# Altium PCB motherboard.PcbDoc
Units mm, origin at the board's own origin, x right, y up, seen from the top; angles counter-clockwise.
Board outline 90 x 64 mm, 2 copper layers (Top Layer, Bottom Layer); 9 components, 25 nets, 93 pads, 0 vias.
Unrouted connection lines stored in the file: 8.
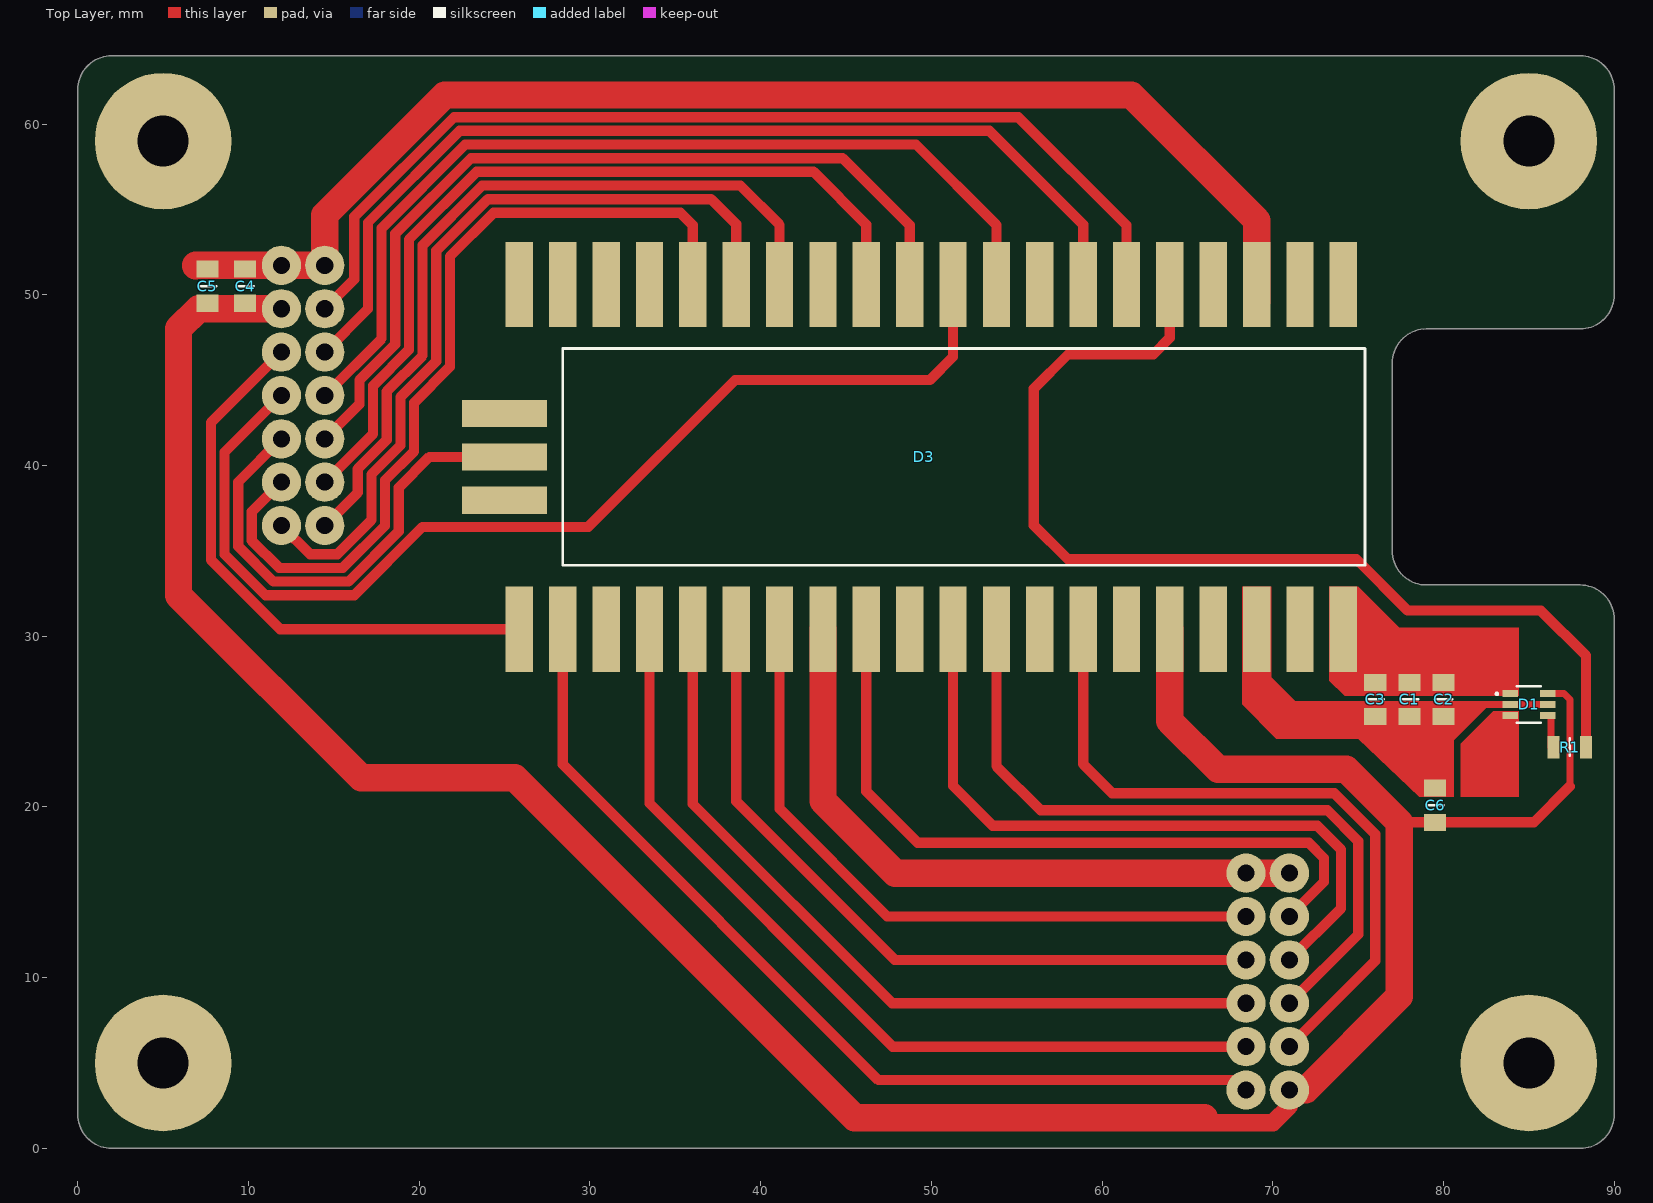
[diagram p0: Top Layer view]
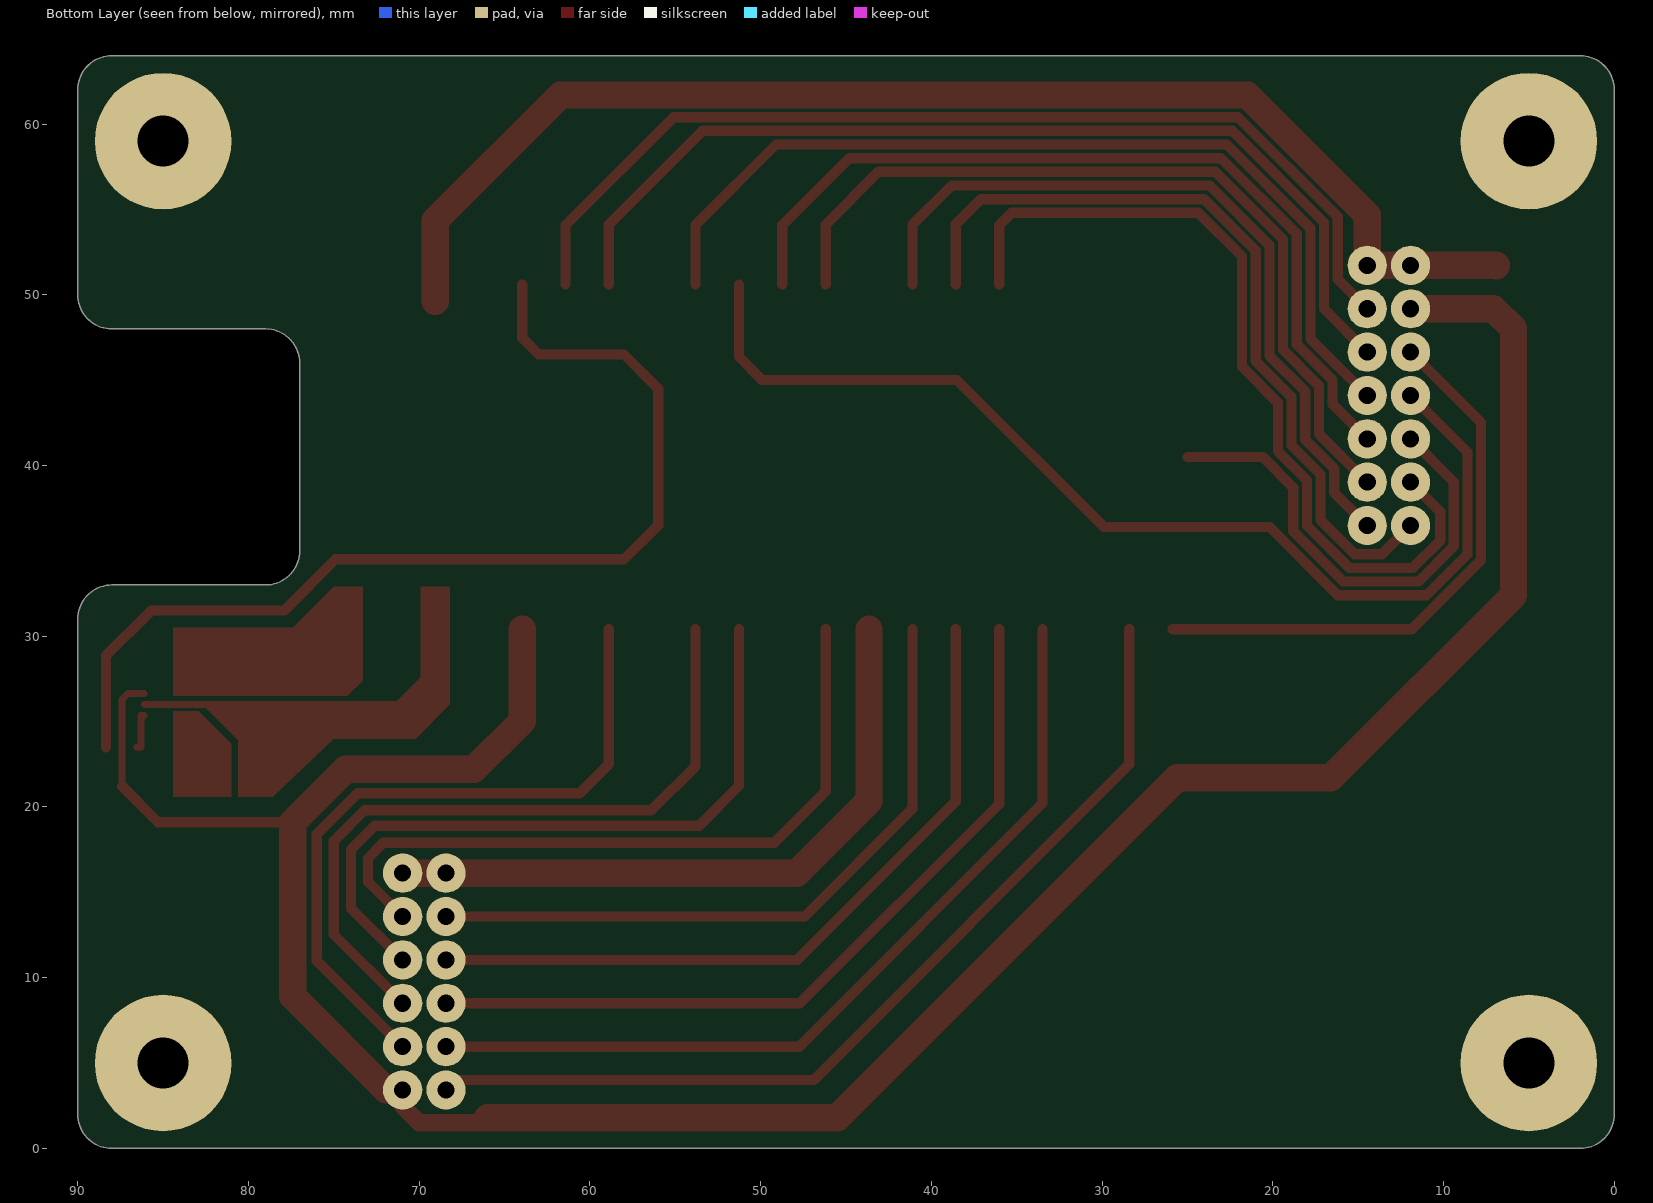
[diagram p1: Bottom Layer view, seen from below]
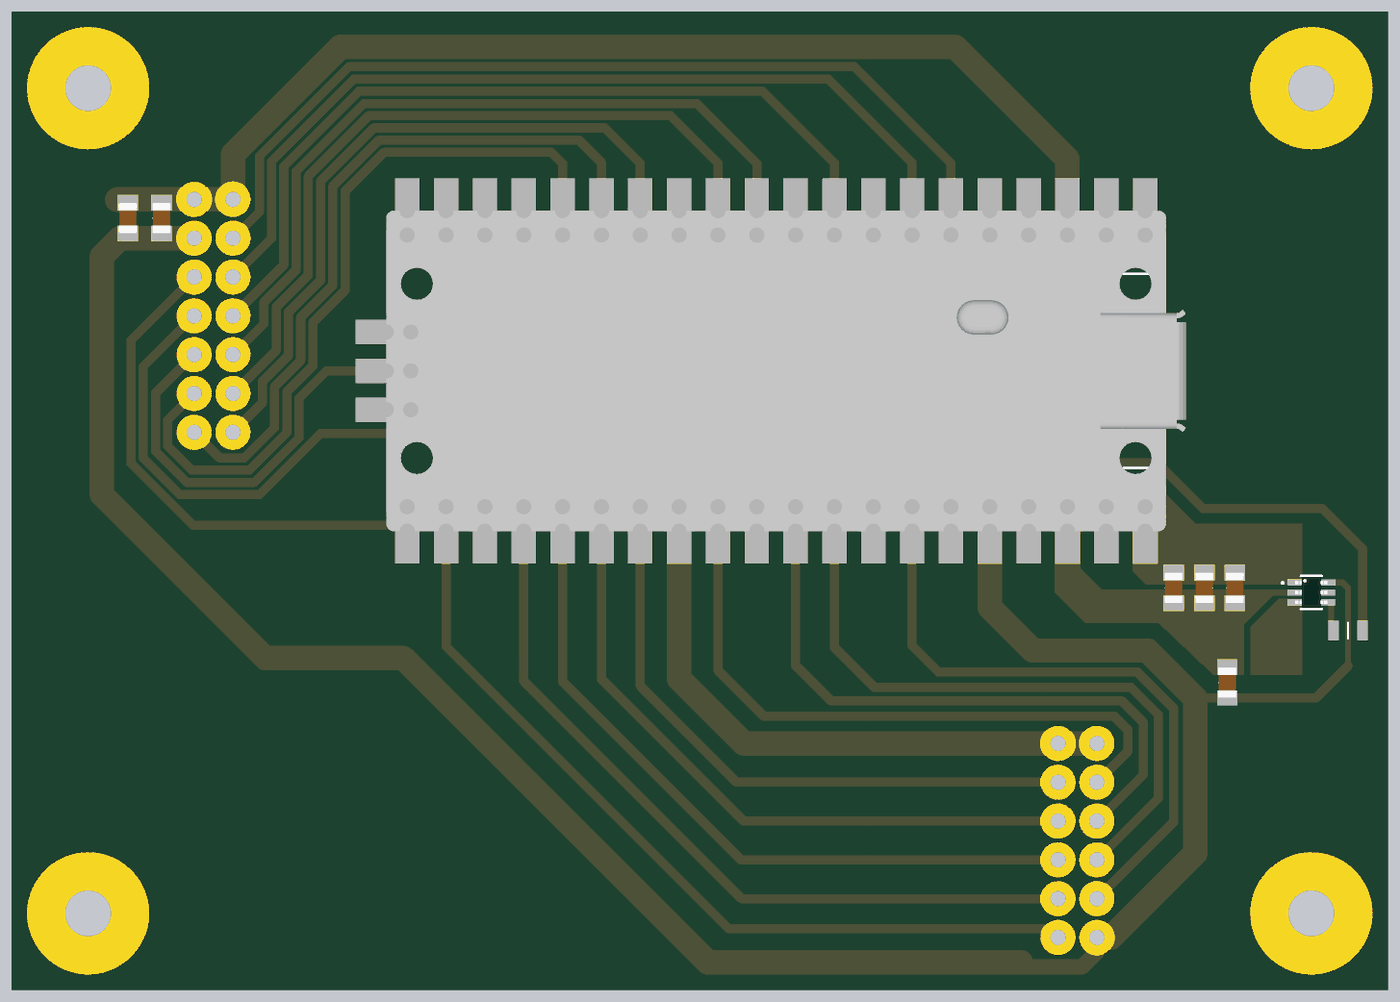
[diagram p2: 3D render of the assembled board from above, using the file's embedded part models]

## Layer stack, top to bottom
Top Solder: solder mask 0.0102, Solder Resist, Dk 3.5
Top Layer: signal copper 0.0356
Dielectric 1: dielectric 0.32, FR-4, Dk 4.8
Bottom Layer: signal copper 0.0356
Bottom Solder: solder mask 0.0102, Solder Resist, Dk 3.5

## Board outline
0,2 ccw(c2,2) 2,0 88,0 ccw(c88,2) 90,2 90,31 ccw(c88,31) 88,33 79,33 cw(c79,35) 77,35 77,46 cw(c79,46) 79,48 88,48 ccw(c88,50) 90,50 90,62 ccw(c88,62) 88,64 2,64 ccw(c2,62) 0,62

## Design rules (kind name [scope] priority, off if disabled: settings)
Clearance [All] p1: gap=0.2 ignorepadtopadclearanceinfootprint=FALSE
HoleSize [All] p1: absolutevalues=TRUE maxlimit=3 minlimit=1 maxpercent=80.000 minpercent=20.000
MinimumSolderMaskSliver [All] p1: minsoldermaskwidth=0.05
OvershootRising [All] p1: maximum=1,000
PolygonConnect [All] p1: connectstyle=Relief reliefconductorwidth=0.254 reliefentries=4 polygonreliefangle="90 Angle" airgapwidth=0.254
RoutingVias [All] p1: holewidth=0.711 width=1.27 viastyle="Through Hole" minholewidth=0.711 minwidth=1.27 maxholewidth=0.711 maxwidth=1.27
SilkToSilkClearance [All] p1: silktosilkclearance=0.1
SilkToSolderMaskClearance [IsPad] p1: minsilkscreentomaskgap=0.1 clearancetoexposedcopper=TRUE
SolderMaskExpansion [All] p1: expansion=0.025
Width [All] p1: maxlimit=2 minlimit=0.4 preferedwidth=0.6
26 further rules are at their usual default settings.

## Components (designator, comment, footprint, x,y, rotation, side; value= is the part's Value field where it differs from the comment)
C1 "GRM21BR71H104K" 0805-CAP 78,26.3 r90 top value="0.1 мкФ"
C2 "GRM21BR71H104K" 0805-CAP 80,26.3 r90 top value="0.1 мкФ"
C3 "GRM21BR71H104K" 0805-CAP 76,26.3 r90 top value="0.1 мкФ"
C4 "GRM21BR71H104K" 0805-CAP 9.8,50.5 r270 top value="0.1 мкФ"
C5 "GRM21BR71H104K" 0805-CAP 7.6,50.5 r270 top value="0.1 мкФ"
C6 "GRM21BR71H104K" 0805-CAP 79.5,20.1 r270 top value="0.1 мкФ"
D1 "SN74LVC1T45DCKT" sc70-6 85,26 r270 top
D3 "Pi Pico" "Pi Pico" 50,40.5 r270 top locked
R1 "RC0805FR-0710KL" 0805-RES 87.4,23.5 r180 top value="10 кОм"

## Footprints (in the part's own frame and the unit in brackets; to place one, negate y for a bottom-side part, rotate by r counter-clockwise, add the part's x,y. Pads: shape width x height; smd on the part's side, far side on the other; paste and mask are expansions set on the pad)
0805-CAP [mm] "Согласно IPC-SM-782"
  rect 1x1.3 smd: 1(-1,0) 2(1,0)
  silkscreen extent 0,-0.51 0,0.51, body extent -1,-0.6 1,0.6, height 1.2
0805-RES [mm] "Standard Thick Film Chip Resistors D/CRCW e3 Vishay"
  rect 0.7x1.3 smd: 1(-0.95,0) 2(0.95,0)
  silkscreen extent 0,-0.51 0,0.51, body extent -1,-0.63 1,0.63, height 0.5
"Pi Pico" [mm] "Raspberry Pi Pico, EVB RP2040"
  rect 5x1.6 smd: 1(-10.1,24.13) 2(-10.1,21.59) 3(-10.1,19.05) 4(-10.1,16.51) 5(-10.1,13.97) 6(-10.1,11.43) 7(-10.1,8.89) 8(-10.1,6.35) 9(-10.1,3.81) 10(-10.1,1.27) 11(-10.1,-1.27) 12(-10.1,-3.81) 13(-10.1,-6.35) 14(-10.1,-8.89) 15(-10.1,-11.43) 16(-10.1,-13.97) 17(-10.1,-16.51) 18(-10.1,-19.05) 19(-10.1,-21.59) 20(-10.1,-24.13) 21(10.1,-24.13) 22(10.1,-21.59) 23(10.1,-19.05) 24(10.1,-16.51) 25(10.1,-13.97) 26(10.1,-11.43) 27(10.1,-8.89) 28(10.1,-6.35) 29(10.1,-3.81) 30(10.1,-1.27) 31(10.1,1.27) 32(10.1,3.81) 33(10.1,6.35) 34(10.1,8.89) 35(10.1,11.43) 36(10.1,13.97) 37(10.1,16.51) 38(10.1,19.05) 39(10.1,21.59) 40(10.1,24.13)
  rect 1.6x5 smd: D1(-2.54,-25) D2(0,-25) D3(2.54,-25)
  silkscreen extent -6.35,-21.59 6.35,25.4, body extent -10.5,-25.5 10.5,26.8, height 3.73
sc70-6 [mm] "футпринт для TMP300B-Q1"
  rect 0.4x0.9 smd: 1(-0.65,-1.1) 2(0,-1.1) 3(0.65,-1.1) 4(0.65,1.1) 5(0,1.1) 6(-0.65,1.1)
  silkscreen extent -1.08,-1.93 1.08,0.7, body extent -1,-1.05 1,1.05, height 0.92

## Part data
C1 C2 C3 C4 C5 C6: library part CMP-0544-A.1, "Конденсатор керамический, 0.1 мкФ, X7R, 50 В, точность 10%, 0805", Voltage="50 В", Accuracy=10%
D1: library part CMP-0607-A.1, "Преобразователь логических уровней с входом направления, 1.65 - 5.5 В", Manufacturer="Texas Instruments", Temperature="-40 - 85°C"
D3: library part CMP-0736-A.1, "Отладочная плата микроконтроллера RP2040, 1.62 - 3.63 В", Manufacturer="Raspberry Pi", Temperature="-20 - 85°C"
R1: library part CMP-0677-A.2, "Резистор, 10 кОм, 0.125 Вт, точность 1%, 0805", Accuracy=1%

## Free pads (board coordinates)
  round 2.3 hole 1: 1(11.93,36.48) 1(68.43,3.42) 2(14.47,36.48) 2(70.97,3.42) 3(11.93,39.02) 3(68.43,5.96) 4(14.47,39.02) 4(70.97,5.96) 5(11.93,41.56) 5(68.43,8.5) 6(14.47,41.56) 6(70.97,8.5) 7(11.93,44.1) 7(68.43,11.04) 8(14.47,44.1) 8(70.97,11.04) 9(11.93,46.64) 9(68.43,13.58) 10(14.47,46.64) 10(70.97,13.58) 11(11.93,49.18) 11(68.43,16.12) 12(14.47,49.18) 12(70.97,16.12) 13(11.93,51.72) 14(14.47,51.72)
  round 8 hole 3: PAD(5,5) PAD(5,59) PAD(85,5) PAD(85,59)

## Nets (pads, with @x,y where several pads share a name; then routed paths per layer and width w, separated by ;. In a path a pad name is that pad's centre, name@x,y a point inside that pad or via, vN(x,y) a via of type N, cw(c..) or ccw(c..) an arc to the next point about the centre after c; other vN are vias at no path point)
3V3: C4.2 C5.2 C6.2 D1.6 D3.36 pad.2@70.97,3.42 pad.11@11.93,49.18 | length 181.6
  Top Layer w0.4: D1.6 87.05,26.65 87.4,26.3 87.4,21.2
  Top Layer w0.6: 43.9,3.3 45.7,1.5 ; 77.4,19.1 85.3,19.1 87.4,21.2
  Top Layer w1: 45.7,1.5 70,1.5 70.97,2.47 pad.2@70.97,3.42
  Top Layer w1.6: pad.11@11.93,49.18 7.08,49.18 5.9,48 5.9,32.4 16.6,21.7 25.6,21.7 45.5,1.8 66,1.8 ; D3.36 63.97,25.03 66.8,22.2 74.3,22.2 77.4,19.1 77.4,8.9 71.92,3.42 pad.2@70.97,3.42
5V0: C1.2 C2.2 C3.2 D1.1 D3.40
BLK: D3.6 pad.12@14.47,49.18 | length 59.8
  Top Layer w0.6: pad.12@14.47,49.18 16.2,50.91 16.2,54.562 22.038,60.4 55.1,60.4 61.43,54.07 D3.6
CS0: D3.15 pad.1@11.93,36.48 | length 47.1
  Top Layer w0.6: pad.1@11.93,36.48 13.61,34.8 15.2,34.8 17.2,36.8 17.2,39.469 18.9,41.169 18.9,44.005 21,46.105 21,52.573 24.027,55.6 37.1,55.6 38.57,54.13 D3.15
CS1: D3.21 pad.9@11.93,46.64 | length 33.6
  Top Layer w0.6: pad.9@11.93,46.64 7.8,42.51 7.8,34.469 11.869,30.4 D3.21
CS2: D3.12 pad.4@14.47,39.02 | length 49.5
  Top Layer w0.6: pad.4@14.47,39.02 17.3,41.85 17.3,44.667 19.4,46.767 19.4,53.236 23.364,57.2 43.1,57.2 46.19,54.11 D3.12
DC: D3.7 pad.10@14.47,46.64 | length 58.5
  Top Layer w0.6: pad.10@14.47,46.64 17,49.17 17,54.23 22.37,59.6 53.4,59.6 58.89,54.11 D3.7
ENC0_A: D3.25 pad.5@68.43,8.5 | length 47.5
  Top Layer w0.6: D3.25 36.03,20.17 47.7,8.5 pad.5@68.43,8.5
ENC0_B: D3.32 pad.6@70.97,8.5 | length 42.2
  Top Layer w0.6: D3.32 53.81,22.39 56.4,19.8 73.2,19.8 75,18 75,12.53 pad.6@70.97,8.5
ENC0_SW: D3.34 pad.4@70.97,5.96 | length 41.2
  Top Layer w0.6: D3.34 58.89,22.51 60.6,20.8 73.6,20.8 76,18.4 76,10.99 pad.4@70.97,5.96
ENC1_A: D3.26 pad.7@68.43,11.04 | length 43.8
  Top Layer w0.6: D3.26 38.57,20.33 47.86,11.04 pad.7@68.43,11.04
ENC1_B: D3.31 pad.8@70.97,11.04 | length 41.2
  Top Layer w0.6: D3.31 51.27,21.23 53.6,18.9 72.6,18.9 74,17.5 74,14.07 pad.8@70.97,11.04
ENC1_SW: D3.24 pad.3@68.43,5.96 | length 51
  Top Layer w0.6: D3.24 33.49,20.21 47.74,5.96 pad.3@68.43,5.96
ENC2_A: D3.27 pad.9@68.43,13.58 | length 40.4
  Top Layer w0.6: D3.27 41.11,19.89 47.42,13.58 pad.9@68.43,13.58
ENC2_B: D3.29 pad.10@70.97,13.58 | length 42.2
  Top Layer w0.6: D3.29 46.19,20.91 49.2,17.9 72.1,17.9 73,17 73,15.61 pad.10@70.97,13.58
ENC2_SW: D3.22 pad.1@68.43,3.42 | length 55.8
  Top Layer w0.6: D3.22 28.41,22.49 46.9,4 67.85,4 pad.1@68.43,3.42
GND: C1.1 C2.1 C3.1 C4.1 C5.1 C6.1 D1.2 D1.5 D3.3 D3.8 D3.13 D3.18 D3.23 D3.28 D3.33 D3.38 D3.D2 pad.5@11.93,41.56 pad.11@68.43,16.12 pad.12@70.97,16.12 pad.13 pad.14 | length 145.5
  Top Layer w0.4: D1.2 D1.5
  Top Layer w0.6: pad.5@11.93,41.56 9.4,39.03 9.4,35.269 11.469,33.2 15.863,33.2 18.8,36.137 18.8,38.7 20.6,40.5 D3.D2
  Top Layer w1.6: 6.9,51.7 6.92,51.72 pad.13 pad.14 14.47,54.67 21.5,61.7 61.7,61.7 69.05,54.35 D3.3@69.05,49.6 ; D3.28 43.65,20.35 47.88,16.12 68.43,16.12 pad.12@70.97,16.12
NetD1_4: D1.4 R1.2 | length 2.3
  Top Layer w0.4: D1.4 86.3,25.35 86.3,23.5 R1.2@86.55,23.5
RST0: D3.14 pad.2@14.47,36.48 | length 45.6
  Top Layer w0.6: pad.2@14.47,36.48 16.4,38.41 16.4,39.8 18.1,41.5 18.1,44.336 20.2,46.436 20.2,52.905 23.695,56.4 38.8,56.4 41.11,54.09 D3.14
RST1: D3.11 pad.6@14.47,41.56 | length 50.8
  Top Layer w0.6: pad.6@14.47,41.56 16.5,43.59 16.5,44.999 18.6,47.099 18.6,53.567 23.033,58 44.8,58 48.73,54.07 D3.11
RST2: D3.16 pad.3@11.93,39.02 | length 50
  Top Layer w0.6: pad.3@11.93,39.02 10.2,37.29 10.2,35.6 11.8,34 15.531,34 18,36.469 18,39.137 19.7,40.837 19.7,43.673 21.8,45.773 21.8,52.242 24.358,54.8 35.3,54.8 36.03,54.07 D3.16
SCL: D3.9 pad.8@14.47,44.1 | length 54.7
  Top Layer w0.6: pad.8@14.47,44.1 17.8,47.43 17.8,53.899 22.701,58.8 49.1,58.8 53.81,54.09 D3.9
SDA: D3.10 pad.7@11.93,44.1 | length 64.4
  Top Layer w0.6: pad.7@11.93,44.1 8.6,40.77 8.6,34.8 11,32.4 16.194,32.4 20.194,36.4 29.9,36.4 38.5,45 49.9,45 51.27,46.37 D3.10
WS_A: D3.5 R1.1 | length 61.2
  Top Layer w0.6: D3.5 63.97,47.47 63,46.5 58,46.5 56,44.5 56,36.5 58,34.5 74.9,34.5 77.9,31.5 85.7,31.5 88.35,28.85 R1.1
WS_L5: D1.3
pads on no net: D3.1 D3.2 D3.4 D3.17 D3.19 D3.20 D3.30 D3.35 D3.37 D3.39 D3.D1 D3.D3

## Other copper
Top Layer:
  region net WS_L5: 84.4,25.6 82.9,25.6 81,23.7 81,20.6 84.4,20.6
  region net 5V0: 84.4,26.5 74.2,26.5 73.3,27.4 73.3,32.9 75,32.9 77.4,30.5 84.4,30.5
  region net GND: 69.9,32.9 69.9,27.6 71.3,26.2 84.4,26.2 84.4,25.8 82.5,25.8 80.6,23.9 80.6,20.6 78.589,20.6 75,24 70.2,24 68.2,26 68.2,32.9

## Silkscreen, mask and mechanical layers (free items; w line width, h text height)
Mechanical 1:
  lines w0.1: 88,0 2,0 cw(c2,2) 0,2 0,62 cw(c2,62) 2,64 88,64 cw(c88,62) 90,62 ; 88,33 79,33 cw(c79,35) 77,35 77,46 cw(c79,46) 79,48 88,48 ccw(c88,50) 90,50 90,62 ; 88,0 ccw(c88,2) 90,2 90,31 ccw(c88,31) 88,33 ; 90,62 90,62